# Altium PCB 双键灯.PcbDoc
Units mm, origin at the board's own origin, x right, y up, seen from the top; angles counter-clockwise.
Board outline 50 x 50 mm, 2 copper layers (Top Layer, Bottom Layer); 26 components, 23 nets, 74 pads, 38 vias.
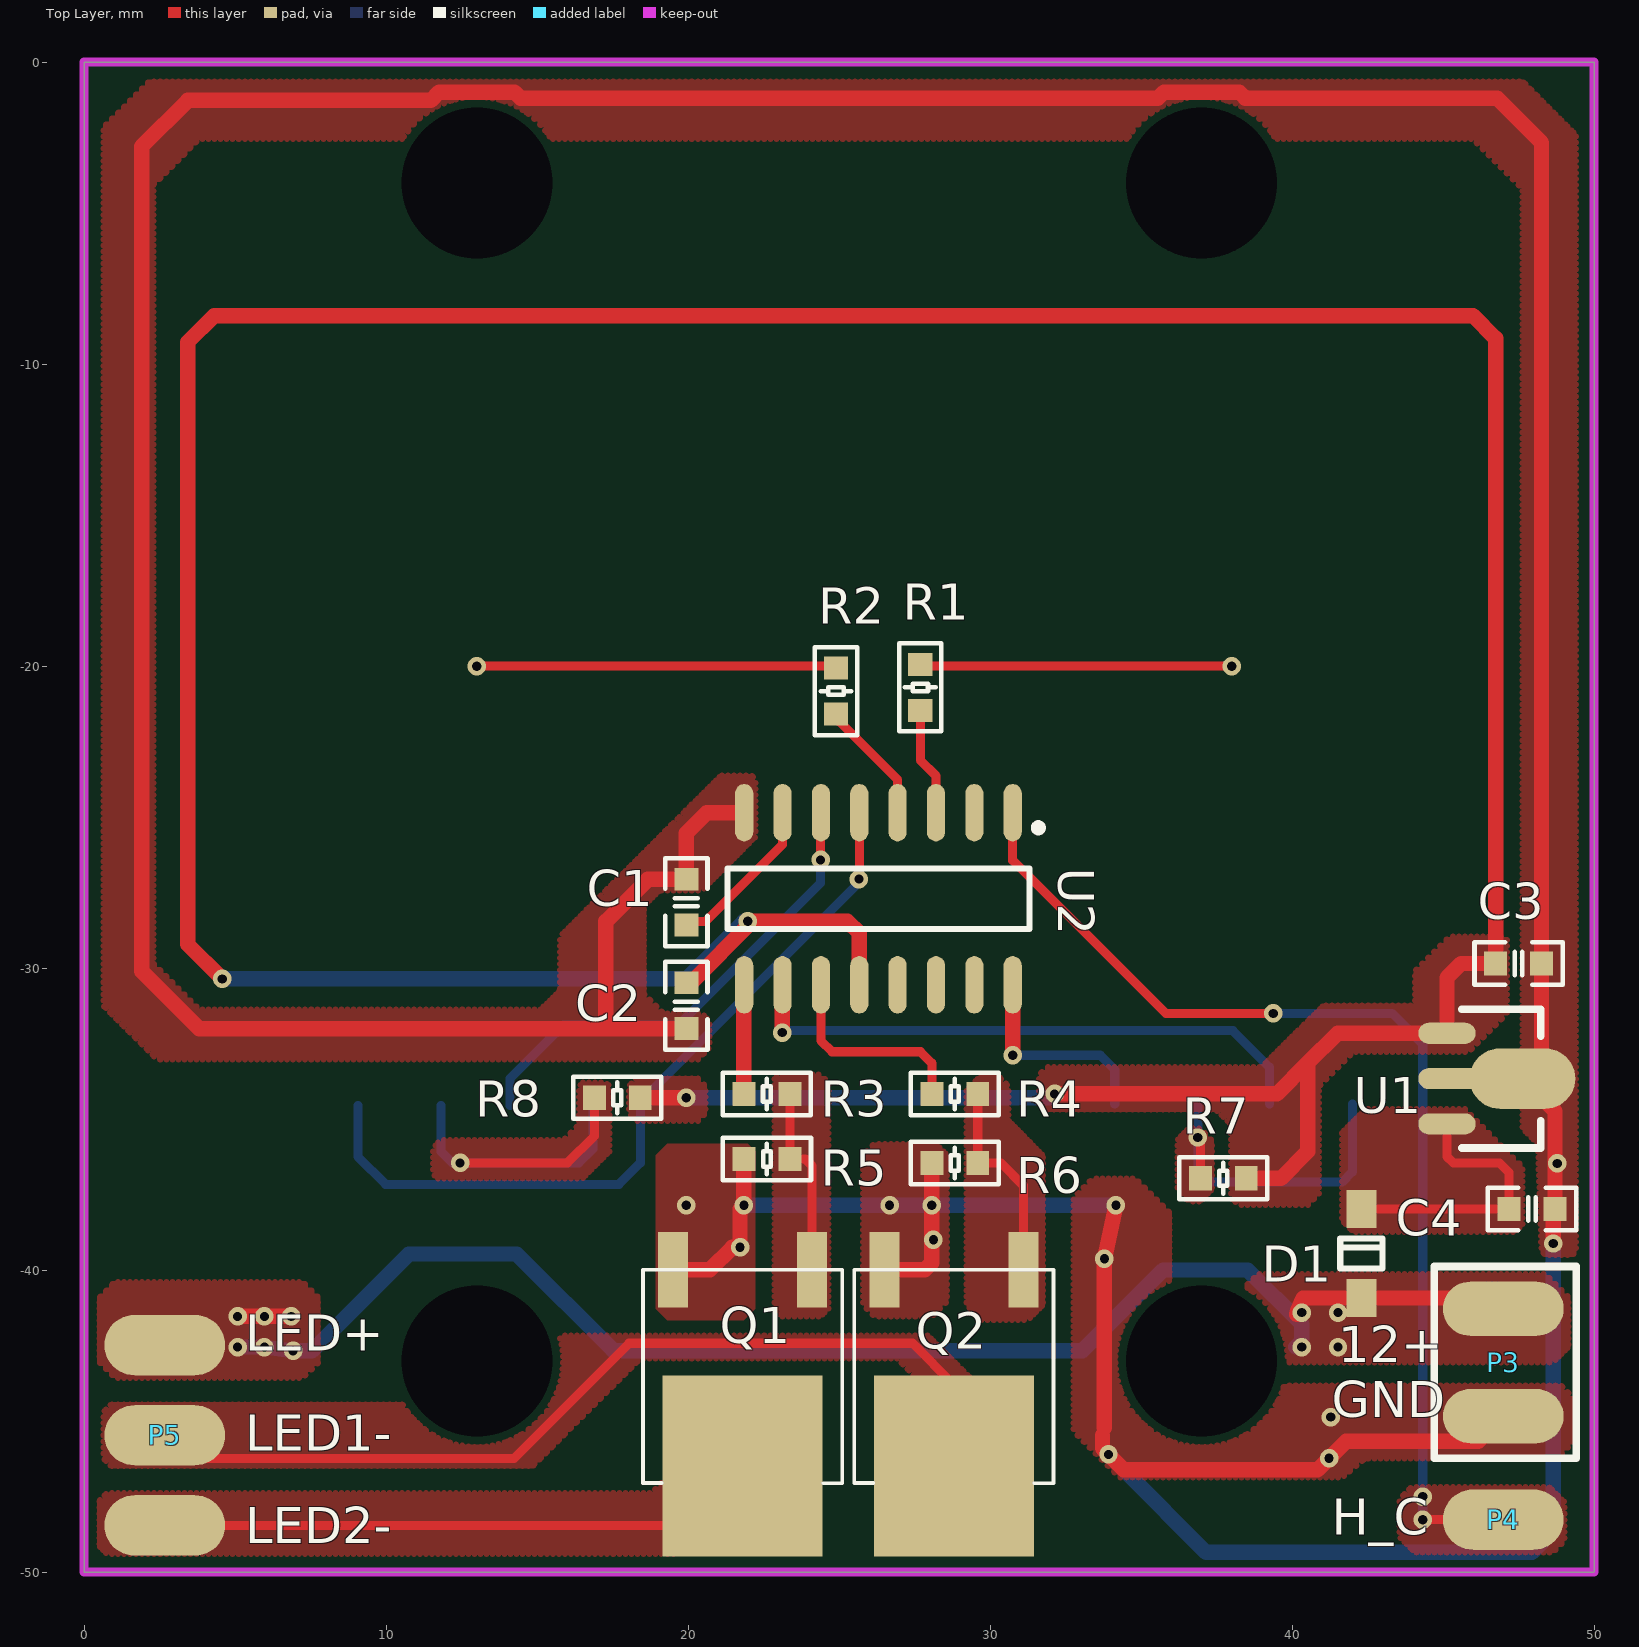
[diagram p0: Top Layer view]
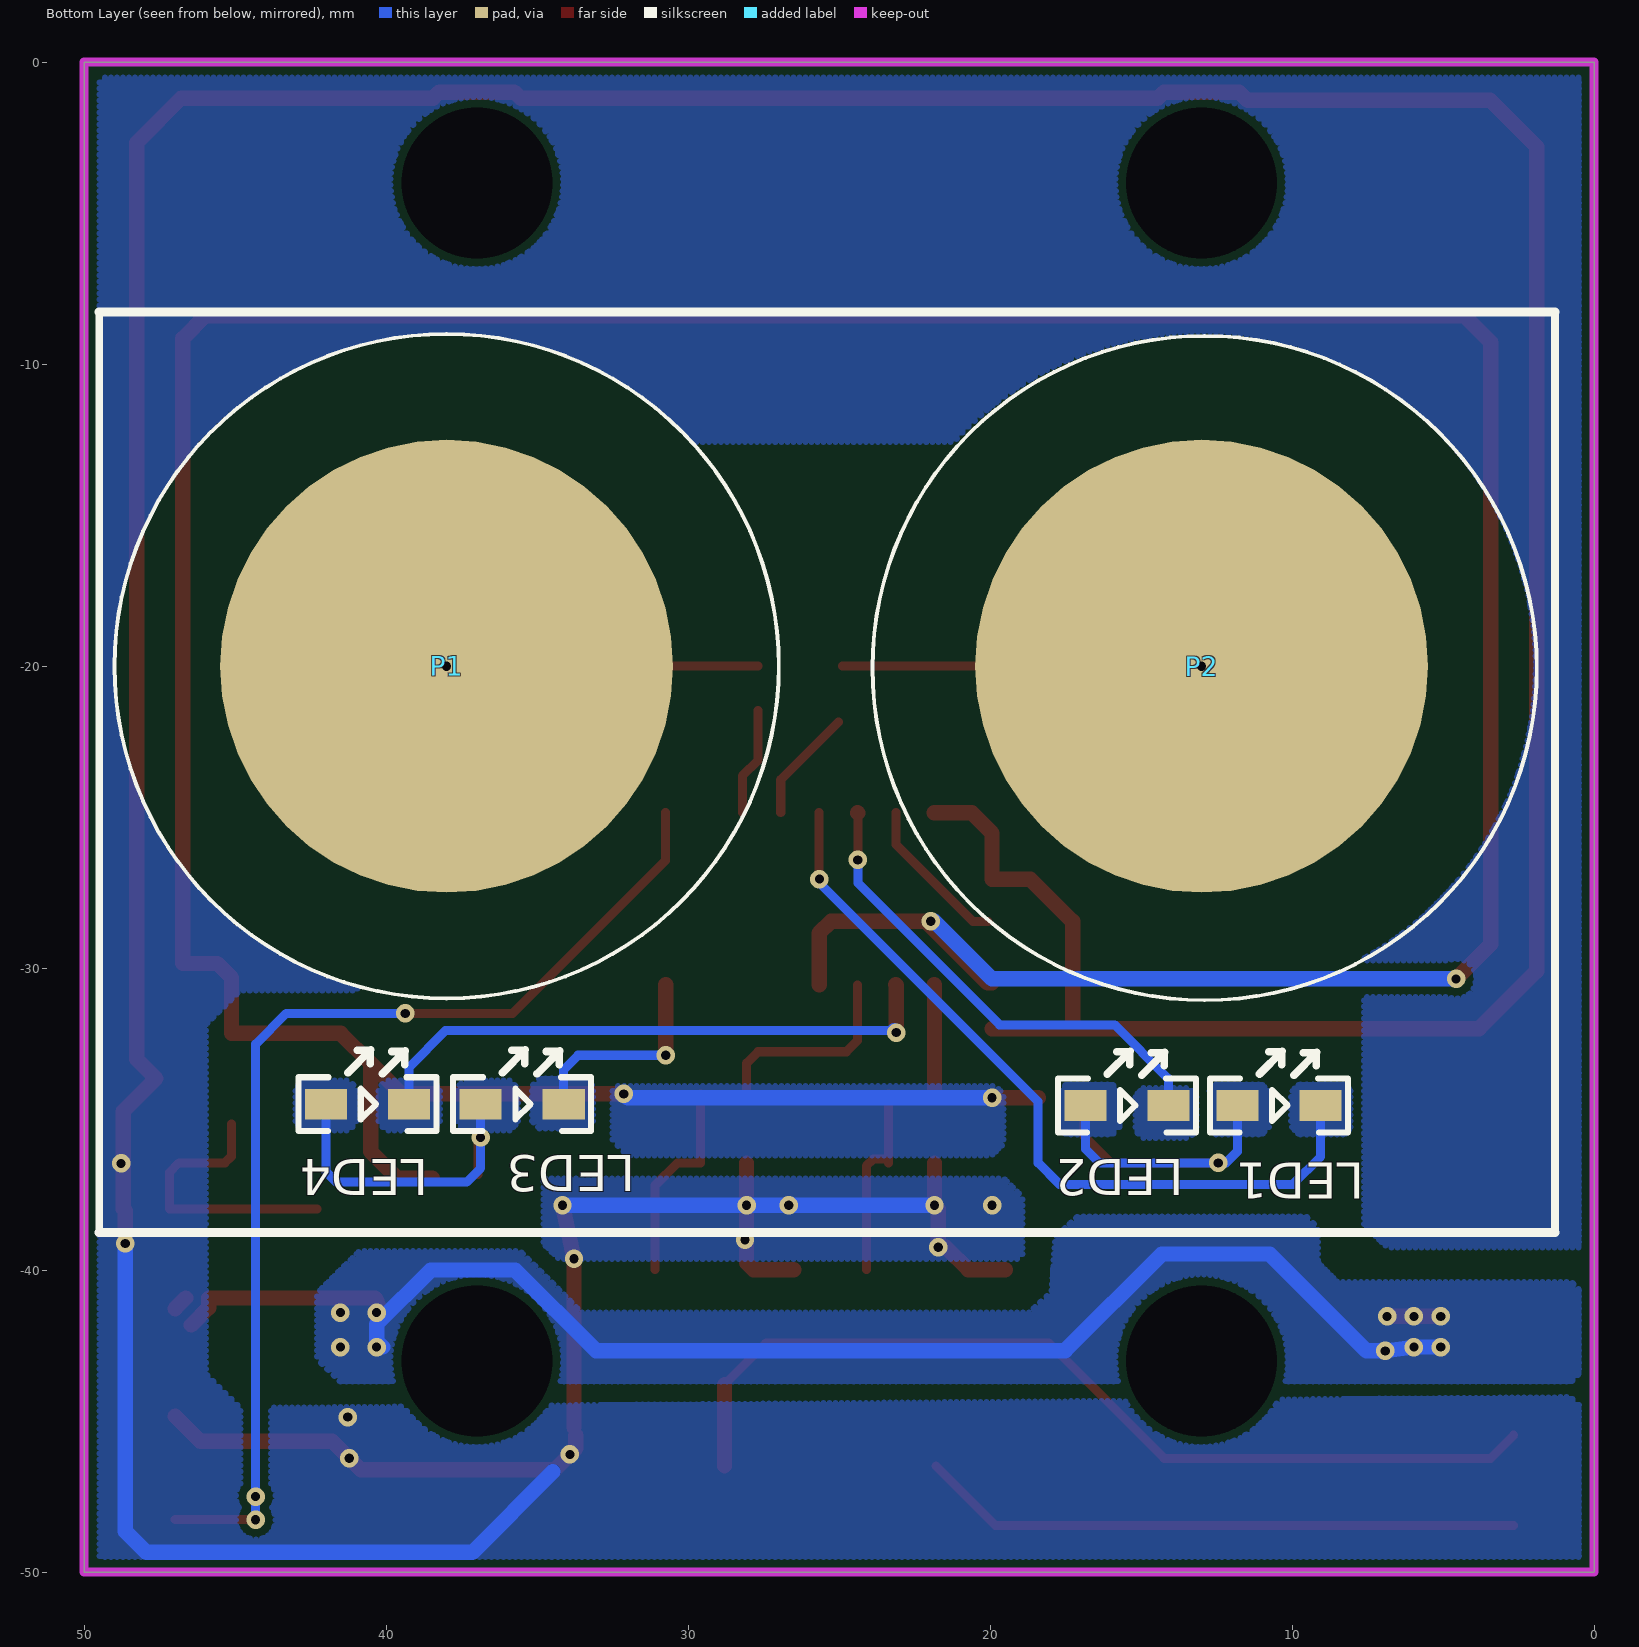
[diagram p1: Bottom Layer view, seen from below]

## Layer stack, top to bottom
Top Solder: solder mask 0.0102, Solder Resist, Dk 3.5
Top Layer: signal copper 0.0356
Dielectric 1: dielectric 0.32, FR-4, Dk 4.8
Bottom Layer: signal copper 0.0356
Bottom Solder: solder mask 0.0102, Solder Resist, Dk 3.5

## Board outline
0,-50 50,-50 50,0 0,0

## Design rules (kind name [scope] priority, off if disabled: settings)
Clearance [All] p1: gap=0.254 ignorepadtopadclearanceinfootprint=FALSE except(0: Arc-Hole Track-Hole SMDPad-Hole THPad-Hole Via-Hole Fill-Hole Poly-Hole Region-Hole Text-Hole)
PolygonConnect [All] p1: connectstyle=Direct reliefconductorwidth=0.254 reliefentries=4 polygonreliefangle="90 Angle" airgapwidth=0.254
RoutingVias [All] p1: holewidth=0.711 width=1.27 viastyle="Through Hole" minholewidth=0.711 minwidth=1.27 maxholewidth=0.711 maxwidth=1.27
SolderMaskExpansion [All] p1: expansion=0.102
Width [All] p1: maxlimit=0.508 minlimit=0.3 preferedwidth=0.3
30 further rules are at their usual default settings.

## Components (designator, comment, footprint, x,y, rotation, side; value= is the part's Value field where it differs from the comment)
C1 "cap" C0603 19.939,-27.815 r270 top
C2 "cap" C0603 19.939,-31.242 r270 top
C3 "cap" C0603 47.496,-29.845 r180 top
C4 "cap" C0603 47.942,-37.973 r180 top
D1 "sod" SOD123 42.291,-39.448 r90 top
LED1 "led" 3806(020LED) 15.472,-34.544 r180 bottom
LED2 "led" 3806(020LED) 10.436,-34.544 r180 bottom
LED3 "led" 3806(020LED) 40.618,-34.5 r180 bottom
LED4 "led" 3806(020LED) 35.5,-34.5 r180 bottom
P1 "T_PAD" TOUCH_PAD 38,-20 r180 bottom
P2 "T_PAD" TOUCH_PAD 13,-20 r180 bottom
P3 "pad2" "PAD_2 _ab" 47.117,-46.863 r180 top
P4 "pad1" PAD 46.99,-48.26 r90 top
P5 "pad3" PAD*3 2.667,-45.466 r270 top
Q1 "pnp" TO-252 21.8,-43.232 r90 top
Q2 "pnp" TO-252 28.8,-43.232 r90 top
R1 "res" R0603 27.686,-20.701 r90 top
R2 "res" R0603 24.892,-20.826 r90 top
R3 "res" R0603 22.604,-34.163 r180 top
R4 "res" R0603 28.827,-34.163 r180 top
R5 "res" R0603 22.606,-36.322 r0 top
R6 "res" R0603 28.827,-36.449 r0 top
R7 "res" R0603 37.719,-36.957 r180 top
R8 "res" R0603 17.653,-34.29 r0 top
U1 "u2" SOT-89 46.375,-33.655 r270 top
U2 "u" SOP16 26.3,-27.7 r180 top

## Footprints (in the part's own frame and the unit in brackets; to place one, negate y for a bottom-side part, rotate by r counter-clockwise, add the part's x,y. Pads: shape width x height; smd on the part's side, far side on the other; paste and mask are expansions set on the pad)
3806(020LED) [mm]
  rect 1.4x1.016 smd: A(-1.375,0) K(1.375,0)
  silkscreen extent -2.29,-0.89 2.29,1.8
C0603 [mm]
  rect 0.76x0.8 smd: 1(-0.76,0) 2(0.76,0)
  silkscreen extent -1.46,-0.7 1.46,0.7
PAD [mm]
  oval 2x4 smd: 1(0,0)
PAD*3 [mm]
  oval 2x4 smd: 1(-2.984,0) 2(0,0) 3(2.984,0)
"PAD_2 _ab" [mm]
  oval 4x1.8 smd: 1(0.127,-2.032) 2(0.127,-5.588)
  silkscreen extent -2.29,-6.98 2.41,-0.63
R0603 [mm]
  rect 0.76x0.8 smd: 1(-0.76,0) 2(0.76,0)
  silkscreen extent -1.46,-0.7 1.46,0.7
SOD123 [mm]
  rect 1.25x1 smd: 1(-1.475,0) 2(1.475,0)
  silkscreen extent -0.5,-0.7 0.5,0.7
SOP16 [mm]
  oval 0.6x1.9 smd: 1(-4.445,-2.85) 2(-3.175,-2.85) 3(-1.905,-2.85) 4(-0.635,-2.85) 5(0.635,-2.85) 6(1.905,-2.85) 7(3.175,-2.85) 8(4.445,-2.85) 9(4.445,2.85) 10(3.175,2.85) 11(1.905,2.85) 12(0.635,2.85) 13(-0.635,2.85) 14(-1.905,2.85) 15(-3.175,2.85) 16(-4.445,2.85)
  silkscreen extent -5.42,-2.47 5,1
SOT-89 [mm]
  oval 0.7x1.9 smd: 1(-1.5,-1.25) 3(1.5,-1.25)
  oval 2x3.5 smd: 2(0,1.25)
  oval 0.7x2.1 smd: 2(0,-1.15)
  silkscreen extent -2.3,-0.75 2.3,1.85
TO-252 [mm]
  rect 6x5.3 smd: 1(-3.25,0)
  rect 2.5x1 smd: 2(3.25,-2.3) 3(3.25,2.3)
  silkscreen extent -3.82,-3.3 3.25,3.3
TOUCH_PAD [mm]
  round 15 on Bottom Solder: 1(0,0)
  round 15 smd: ""(0,0)

## Free pads (board coordinates)
  round 0 hole 5 unplated: ""(13,-43) ""(13,-4) ""(37,-43) ""(37,-4)

## Via types
v1: diameter 0.61, hole 0.305, Top Layer to Bottom Layer, tented both sides, 38 vias

## Nets (pads, with @x,y where several pads share a name; then routed paths per layer and width w, separated by ;. In a path a pad name is that pad's centre, name@x,y a point inside that pad or via, vN(x,y) a via of type N, cw(c..) or ccw(c..) an arc to the next point about the centre after c; other vN are vias at no path point)
5V: C2.1 C3.2 R7.1 R8.2 U1.1 U2.12 | length 149.4
  Top Layer w0.508: v1(4.572,-30.353) 3.429,-29.21 3.429,-9.271 4.307,-8.393 45.985,-8.393 46.736,-9.144 C3.2 45.593,-29.845 45.125,-30.313 U1.1 41.505,-32.155 40.513,-33.147 ; R8.2 v1(19.939,-34.29) ; C2.1 20.086,-30.482 22.12,-28.448 25.273,-28.448 25.665,-28.84 U2.12 ; v1(32.131,-34.163) 39.497,-34.163 40.513,-33.147 ; R7.1 39.624,-36.957 40.513,-36.068 40.513,-33.147
  Bottom Layer w0.508: v1(4.572,-30.353) 19.939,-30.353 21.844,-28.448 v1(21.971,-28.448) ; v1(19.939,-34.29) 32.004,-34.29 v1(32.131,-34.163)
12V: D1.1 P3.2 P5.1 | length 50.3
  Top Layer w0.508: v1(5.08,-41.529) v1(5.969,-41.529) v1(6.858,-41.529) ; v1@40.154,-41.469 40.141,-41.438 40.18,-41.344 40.357,-40.923 D1.1 45.876,-40.923 45.876,-41.239 P3.2@46.451,-41.814 ; P3.2@46.638,-40.923 P3.2
  Bottom Layer w0.508: v1(5.08,-42.545) v1(5.969,-42.545) v1(6.918,-42.672) 7.54,-42.672 10.747,-39.465 14.319,-39.465 17.519,-42.665 33.055,-42.665 35.728,-39.992 38.524,-39.992 40.318,-41.786 40.318,-42.345 40.118,-42.545 v1(40.318,-42.545)
  other v1: 41.518,-42.545 40.318,-41.402 41.518,-41.402
GND: C1.1 C2.2 C3.1 C4.1 P3.1 Q1.3 Q2.3 R5.1 R6.1 U1.2 U2.8 | length 211.7
  Top Layer w0.508: Q1.3 20.724,-39.982 21.463,-39.243 v1(21.717,-39.243) 21.717,-37.973 v1(21.844,-37.846) R5.1@21.844,-36.449 ; C2.2 17.272,-32.002 ; U2.8 20.616,-24.85 19.939,-25.527 C1.1 18.665,-27.055 17.272,-28.448 17.272,-32.002 ; Q2.3 27.836,-39.982 28.067,-39.751 v1(28.067,-37.846) R6.1 ; 33.718,-45.465 33.718,-45.901 v1(33.918,-46.101) 34.426,-46.609 40.839,-46.609 v1(41.22,-46.228) 41.783,-45.665 46.156,-45.665 P3.1 ; 33.782,-45.212 v1(33.782,-39.624) v1(34.163,-37.846) ; v1(48.641,-39.116) 48.641,-38.034 C4.1 48.702,-34.732 47.625,-33.655 48.256,-33.024 C3.1 48.256,-2.663 46.786,-1.193 38.447,-1.193 38.246,-0.992 35.754,-0.992 35.553,-1.193 14.447,-1.193 14.246,-0.992 11.754,-0.992 11.481,-1.265 3.434,-1.265 1.905,-2.794 1.905,-30.099 3.808,-32.002 17.272,-32.002
  Bottom Layer w0.508: v1(21.844,-37.846) v1(26.67,-37.846) v1(28.067,-37.846) v1(34.163,-37.846) ; 34.48,-46.672 37.15,-49.342 47.94,-49.342 48.641,-48.641 v1(48.641,-39.116)
  other v1: 41.275,-44.865 28.118,-38.989 19.939,-37.846 48.779,-36.465
NetC1_2: C1.2 U2.7 | length 5.2
  Top Layer w0.3: C1.2@20.066,-28.448 20.574,-28.448 23.125,-25.897 U2.7
NetC4_2: C4.2 D1.2 U1.3 | length 9.5
  Top Layer w0.3: D1.2 C4.2 47.182,-36.768 46.863,-36.449 45.339,-36.449 45.125,-36.235 U1.3
NetD1_1: 
NetLED1_A: LED1.A LED2.A R8.1 | length 14.4
  Top Layer w0.3: v1(12.446,-36.449) 16.002,-36.449 16.893,-35.558 R8.1
  Bottom Layer w0.3: LED2.A 11.811,-36.068 12.192,-36.449 v1(12.446,-36.449) 16.383,-36.449 16.847,-35.985 LED1.A
NetLED1_K: LED1.K U2.6 | length 16.2
  Top Layer w0.3: v1(24.384,-26.416) U2.6@24.384,-24.861
  Top Layer w0.508: U2.6@24.384,-24.861 U2.6
  Bottom Layer w0.3: LED1.K 14.097,-33.655 15.875,-31.877 19.685,-31.877 24.384,-27.178 v1(24.384,-26.416)
NetLED2_K: LED2.K U2.5 | length 26.3
  Top Layer w0.3: v1@25.665,-27.04 U2.5
  Top Layer w0.508: v1(25.654,-27.051) v1@25.665,-27.04
  Bottom Layer w0.3: LED2.K 9.061,-36.239 9.98,-37.158 17.706,-37.158 18.415,-36.449 18.415,-34.417 25.654,-27.178 v1(25.654,-27.051)
NetLED3_A: LED3.A LED4.A R7.2 | length 10.9
  Top Layer w0.3: R7.2@36.959,-36.83 v1@36.959,-35.814
  Bottom Layer w0.3: v1@36.793,-35.687 v1(36.875,-35.605) ; LED4.A v1(36.875,-35.605) ; LED3.A 41.993,-36.747 41.656,-37.084 37.338,-37.084 36.875,-36.621 v1(36.875,-35.605)
NetLED3_K: LED3.K U2.10 | length 19.5
  Top Layer w0.508: v1(23.114,-32.131) 23.114,-30.561 U2.10
  Bottom Layer w0.3: v1@23.176,-32.069 38.038,-32.069 39.243,-33.274 LED3.K
  Bottom Layer w0.508: v1(23.114,-32.131) v1@23.176,-32.069
NetLED4_K: LED4.K U2.16 | length 7
  Top Layer w0.508: v1(30.745,-32.882) U2.16
  Bottom Layer w0.3: v1(30.745,-32.882) 33.644,-32.882 34.125,-33.363 LED4.K
NetP1_4: P2. R2.2 | length 11.9
  Top Layer w0.3: v1(13,-20) R2.2@24.892,-20
NetP2_4: P1. R1.2 | length 10.3
  Top Layer w0.3: R1.2@27.686,-20 v1(38,-20)
NetP4_1: P4.1 U2.1 | length 36.1
  Top Layer w0.3: U2.1 30.745,-26.427 35.814,-31.496 v1(39.37,-31.496) ; v1(44.323,-48.26) P4.1
  Bottom Layer w0.3: v1(39.37,-31.496) 43.307,-31.496 44.323,-32.512 v1(44.323,-47.498) v1(44.323,-48.26)
NetP5_2: P5.2 Q2.1 | length 31.3
  Top Layer w0.3: P5.2 3.429,-46.228 14.237,-46.228 18.047,-42.418 27.432,-42.418 Q2.1@28.8,-43.786
  Top Layer w0.508: Q2.1 Q2.1@28.8,-43.786
NetP5_3: P5.3 Q1.1 | length 19.9
  Top Layer w0.3: P5.3 19.831,-48.45 Q1.1
NetQ1_2: Q1.2 R3.1 R5.2 | length 6.5
  Top Layer w0.3: R5.2@23.364,-36.449 R3.1 ; R5.2 23.876,-36.322 24.1,-36.546 Q1.2
NetQ2_2: Q2.2 R4.1 R6.2 | length 6.9
  Top Layer w0.3: R4.1 R6.2 30.353,-36.449 31.1,-37.196 Q2.2
NetR1_1: R1.1 U2.3 | length 3.6
  Top Layer w0.3: R1.1 27.686,-23.114 28.205,-23.633 U2.3
NetR2_1: R2.1 U2.4 | length 3.8
  Top Layer w0.3: R2.1@25.017,-21.842 26.935,-23.76 U2.4
NetR3_2: R3.2 U2.9 | length 3.6
  Top Layer w0.508: R3.2 21.844,-30.561 U2.9
NetR4_2: R4.2 U2.11 | length 6.8
  Top Layer w0.3: U2.11 24.395,-32.396 24.765,-32.766 27.686,-32.766 28.067,-33.147 R4.2
pads on no net: P1.1 P2.1 U2.2 U2.13 U2.14 U2.15

## Polygon pours and split planes (outlines as drawn)
GND on Top Layer "GND_L01_P032" (hatched 90Degree grid 0.2 track 0.2, remove dead copper, pour order 32): 48.387,-39.497 49.276,-39.497 49.403,-39.37 49.403,-2.413 47.625,-0.635 2.159,-0.635 0.635,-2.159 0.635,-31.242 2.413,-33.02 20.32,-33.02 20.701,-32.639 20.701,-31.75 20.447,-31.496 19.177,-31.496 18.542,-30.861 18.542,-27.94 19.05,-27.432 20.447,-27.432 20.701,-27.178 22.225,-25.654 22.225,-23.749 22.098,-23.622 21.082,-23.622 20.447,-24.257 19.304,-25.4 18.542,-26.162 15.748,-28.956 15.748,-30.734 15.113,-31.369 3.81,-31.369 2.286,-29.845 2.286,-4.064 3.81,-2.54 45.974,-2.54 47.625,-4.191 47.625,-35.306 48.133,-35.814 48.256,-39.37
NetLED1_A on Top Layer "NETLED1_A_L01_P034" (hatched 90Degree grid 0.2 track 0.2, remove dead copper, pour order 34): 17.272,-33.782 17.399,-33.909 17.399,-36.068 16.51,-36.957 11.684,-36.957 11.557,-36.83 11.557,-35.941 11.811,-35.687 15.875,-35.687 16.383,-35.179 16.383,-33.909 16.51,-33.782
5V on Top Layer "5V_L01_P030" (hatched 90Degree grid 0.2 track 0.2, remove dead copper, pour order 30): 31.877,-34.671 37.465,-34.671 37.973,-35.179 37.973,-37.592 38.227,-37.846 40.513,-37.846 40.894,-37.465 40.894,-33.909 42.037,-32.766 45.847,-32.766 47.117,-31.496 47.117,-31.242 47.117,-28.956 45.212,-28.956 44.069,-30.099 44.069,-31.242 41.021,-31.242 38.989,-33.274 31.877,-33.274 31.623,-33.528 31.623,-34.417
NetLED3_A on Top Layer "NETLED3_A_L01_P028" (hatched 90Degree grid 0.2 track 0.2, remove dead copper, pour order 28): 36.576,-35.306 36.957,-35.306 37.338,-35.687 37.338,-37.338 36.957,-37.719 36.576,-37.719 36.195,-37.338 36.195,-35.687
NetC4_2 on Top Layer "NETC4_2_L01_P026" (hatched 90Degree grid 0.2 track 0.2, remove dead copper, pour order 26): 42.037,-38.735 47.371,-38.735 47.625,-38.481 47.625,-36.576 45.72,-34.671 42.418,-34.671 41.656,-35.433 41.656,-38.354
NetP4_1 on Top Layer "NETP4_1_L01_P024" (hatched 90Degree grid 0.2 track 0.2, remove dead copper, pour order 24): 43.942,-47.185 48.514,-47.185 49.022,-47.693 49.022,-48.963 48.641,-49.344 44.069,-49.344 43.561,-48.836 43.561,-47.566
GND on Top Layer "GND_L01_P022" (hatched 90Degree grid 0.2 track 0.2, remove dead copper, pour order 22): 33.401,-36.957 34.798,-36.957 35.941,-38.1 35.941,-42.418 37.338,-43.815 48.895,-43.815 49.276,-44.196 49.276,-45.72 48.768,-46.228 42.418,-46.228 41.656,-46.863 34.29,-46.863 32.766,-45.339 32.766,-37.592
12V on Top Layer "12V_L01_P020" (hatched 90Degree grid 0.2 track 0.2, remove dead copper, pour order 20): 38.862,-40.132 48.387,-40.132 49.149,-40.894 49.149,-42.545 48.641,-43.053 38.608,-43.053 38.1,-42.545 38.1,-40.894
12V on Top Layer "12V_L01_P018" (hatched 90Degree grid 0.2 track 0.2, remove dead copper, pour order 18): 0.508,-43.053 0.508,-40.894 1.016,-40.386 7.239,-40.386 7.747,-40.894 7.747,-43.053 7.239,-43.561 1.016,-43.561
NetP5_3 on Top Layer "NETP5_3_L01_P016" (hatched 90Degree grid 0.2 track 0.2, remove dead copper, pour order 16): 0.508,-47.625 0.508,-49.149 0.762,-49.403 19.685,-49.403 19.685,-46.863 19.304,-46.863 18.796,-47.371 0.762,-47.371
NetP5_2 on Top Layer "NETP5_2_L01_P014" (hatched 90Degree grid 0.2 track 0.2, remove dead copper, pour order 14): 0.635,-44.704 0.635,-46.228 0.889,-46.482 13.208,-46.482 14.859,-46.482 17.272,-44.069 18.415,-42.926 26.924,-42.926 27.94,-43.942 29.718,-43.942 27.94,-42.164 14.224,-42.164 11.938,-44.45 0.889,-44.45
NetQ2_2 on Top Layer "NETQ2_2_L01_P012" (hatched 90Degree grid 0.2 track 0.2, remove dead copper, pour order 12): 29.21,-34.036 29.21,-41.148 29.718,-41.656 31.242,-41.656 31.75,-41.148 31.75,-36.195 31.115,-35.56 30.607,-35.052 30.607,-33.909 30.226,-33.528 29.718,-33.528
NetQ1_2 on Top Layer "NETQ1_2_L01_P010" (hatched 90Degree grid 0.2 track 0.2, remove dead copper, pour order 10): 22.987,-33.528 24.384,-33.528 24.638,-33.782 24.638,-41.275 24.384,-41.529 23.114,-41.529 22.86,-41.275 22.86,-33.655
GND on Top Layer "GND_L01_P006" (hatched 90Degree grid 0.2 track 0.2, remove dead copper, pour order 6): 26.162,-41.529 28.067,-41.529 28.575,-41.021 28.575,-36.195 28.194,-35.814 26.162,-35.814 25.781,-36.195 25.781,-41.148
GND on Top Layer "GND_L01_P004" (solid, remove dead copper, pour order 4): 19.304,-41.656 21.844,-41.656 22.225,-41.275 22.225,-36.068 21.971,-35.814 19.304,-35.814 18.923,-36.195 18.923,-36.449 18.923,-41.275
5V on Top Layer "5V_L01_P036" (hatched 90Degree grid 0.2 track 0.2, remove dead copper, pour order 36): 18.288,-33.655 20.32,-33.655 20.574,-33.909 20.574,-34.798 20.32,-35.052 18.288,-35.052 18.034,-34.798 18.034,-33.909
NetLED1_A on Bottom Layer "NETLED1_A_L02_P068" (hatched 90Degree grid 0.2 track 0.2, remove dead copper, pour order 68): 15.958,-33.848 17.482,-33.848 17.736,-34.102 17.736,-35.245 17.482,-35.499 15.958,-35.499 15.704,-35.245 15.704,-34.102
NetLED1_K on Bottom Layer "NETLED1_K_L02_P066" (hatched 90Degree grid 0.2 track 0.2, remove dead copper, pour order 66): 13.418,-33.975 14.942,-33.975 15.196,-34.229 15.196,-35.372 14.942,-35.626 13.418,-35.626 13.164,-35.372 13.164,-34.229
NetLED1_A on Bottom Layer "NETLED1_A_L02_P064" (hatched 90Degree grid 0.2 track 0.2, remove dead copper, pour order 64): 11.005,-33.848 12.529,-33.848 12.783,-34.102 12.783,-35.245 12.529,-35.499 11.005,-35.499 10.751,-35.245 10.751,-34.102
NetLED2_K on Bottom Layer "NETLED2_K_L02_P062" (hatched 90Degree grid 0.2 track 0.2, remove dead copper, pour order 62): 8.255,-33.848 9.779,-33.848 10.033,-34.102 10.033,-35.245 9.779,-35.499 8.255,-35.499 8.001,-35.245 8.001,-34.102
NetLED3_A on Bottom Layer "NETLED3_A_L02_P060" (hatched 90Degree grid 0.2 track 0.2, remove dead copper, pour order 60): 35.897,-33.721 37.421,-33.721 37.675,-33.975 37.675,-35.118 37.421,-35.372 35.897,-35.372 35.643,-35.118 35.643,-33.975
NetLED3_A on Bottom Layer "NETLED3_A_L02_P058" (hatched 90Degree grid 0.2 track 0.2, remove dead copper, pour order 58): 41.231,-33.715 42.755,-33.715 43.009,-33.969 43.009,-35.112 42.755,-35.366 41.231,-35.366 40.977,-35.112 40.977,-33.969
NetLED3_K on Bottom Layer "NETLED3_K_L02_P056" (hatched 90Degree grid 0.2 track 0.2, remove dead copper, pour order 56): 38.481,-33.715 40.005,-33.715 40.259,-33.969 40.259,-35.112 40.005,-35.366 38.481,-35.366 38.227,-35.112 38.227,-33.969
NetLED4_K on Bottom Layer "NETLED4_K_L02_P054" (hatched 90Degree grid 0.2 track 0.2, remove dead copper, pour order 54): 33.401,-33.655 34.925,-33.655 35.179,-33.909 35.179,-35.052 34.925,-35.306 33.401,-35.306 33.147,-35.052 33.147,-33.909
5V on Bottom Layer "5V_L02_P052" (hatched 90Degree grid 0.2 track 0.2, remove dead copper, pour order 52): 19.812,-33.909 32.385,-33.909 32.512,-34.036 32.512,-35.687 32.004,-36.195 19.939,-36.195 19.558,-35.814 19.558,-34.163
GND on Bottom Layer "GND_L02_P050" (hatched 90Degree grid 0.2 track 0.2, remove dead copper, pour order 50): 0,-44.971 0,-49.911 50.038,-49.911 50.038,-0.127 49.911,0 0.127,0 0,-0.127 0,-39.243 6.858,-39.243 7.62,-38.481 7.62,-30.734 20.955,-30.734 20.955,-12.573 25.019,-12.573 29.972,-12.573 29.972,-30.734 44.831,-30.734 45.974,-31.877 45.974,-43.429 44.831,-44.563 0.773,-44.204
12V on Bottom Layer "12V_L02_P038" (hatched 90Degree grid 0.2 track 0.2, remove dead copper, pour order 38): 0.381,-40.767 0.381,-43.307 0.762,-43.688 41.021,-43.688 41.529,-43.688 42.291,-42.926 42.291,-40.767 40.894,-39.37 35.56,-39.37 33.528,-41.402 18.711,-41.402 17.98,-40.727 17.833,-38.892 17.113,-38.227 9.525,-38.227 9.144,-38.608 9.144,-39.751 8.509,-40.386 0.762,-40.386
GND on Bottom Layer "GND_L02_P008" (hatched 90Degree grid 0.2 track 0.2, remove dead copper, pour order 8): 18.923,-37.592 19.558,-36.957 34.798,-36.957 34.798,-39.116 34.29,-39.624 18.923,-39.624

## Keep-outs
Keep-Out Layer:
  the board outline again, w0.3

## Silkscreen, mask and mechanical layers (free items; w line width, h text height)
Top Overlay:
  text "LED+" at 5.334,-42.672 h1.2
  text "12+" at 41.518,-43.053 h1.2
  text "GND" at 41.318,-44.865 h1.2
  text "LED1-" at 5.334,-45.974 h1.2
  text "H_C" at 41.318,-48.768 h1.2
  text "LED2-" at 5.334,-49.046 h1.2
Bottom Overlay:
  circle w0.127: c12.9,-20.061 r11
  circle w0.127: c38,-20 r11
  lines w0.254: 1.3,-38.75 1.3,-8.27 ; 49.505,-38.75 49.505,-8.27
  lines w0.3: 1.3,-38.75 49.505,-38.75 ; 1.3,-8.27 49.505,-8.27